# Altium PCB qav90.PcbDoc (part 3 of 3)
Units mm, origin at the board's own origin, x right, y up, seen from the top; angles counter-clockwise.
Board outline 90 x 90 mm, 3 copper layers (Top Layer, Mid-Layer 1, Bottom Layer); 94 components, 77 nets, 335 pads, 152 vias.
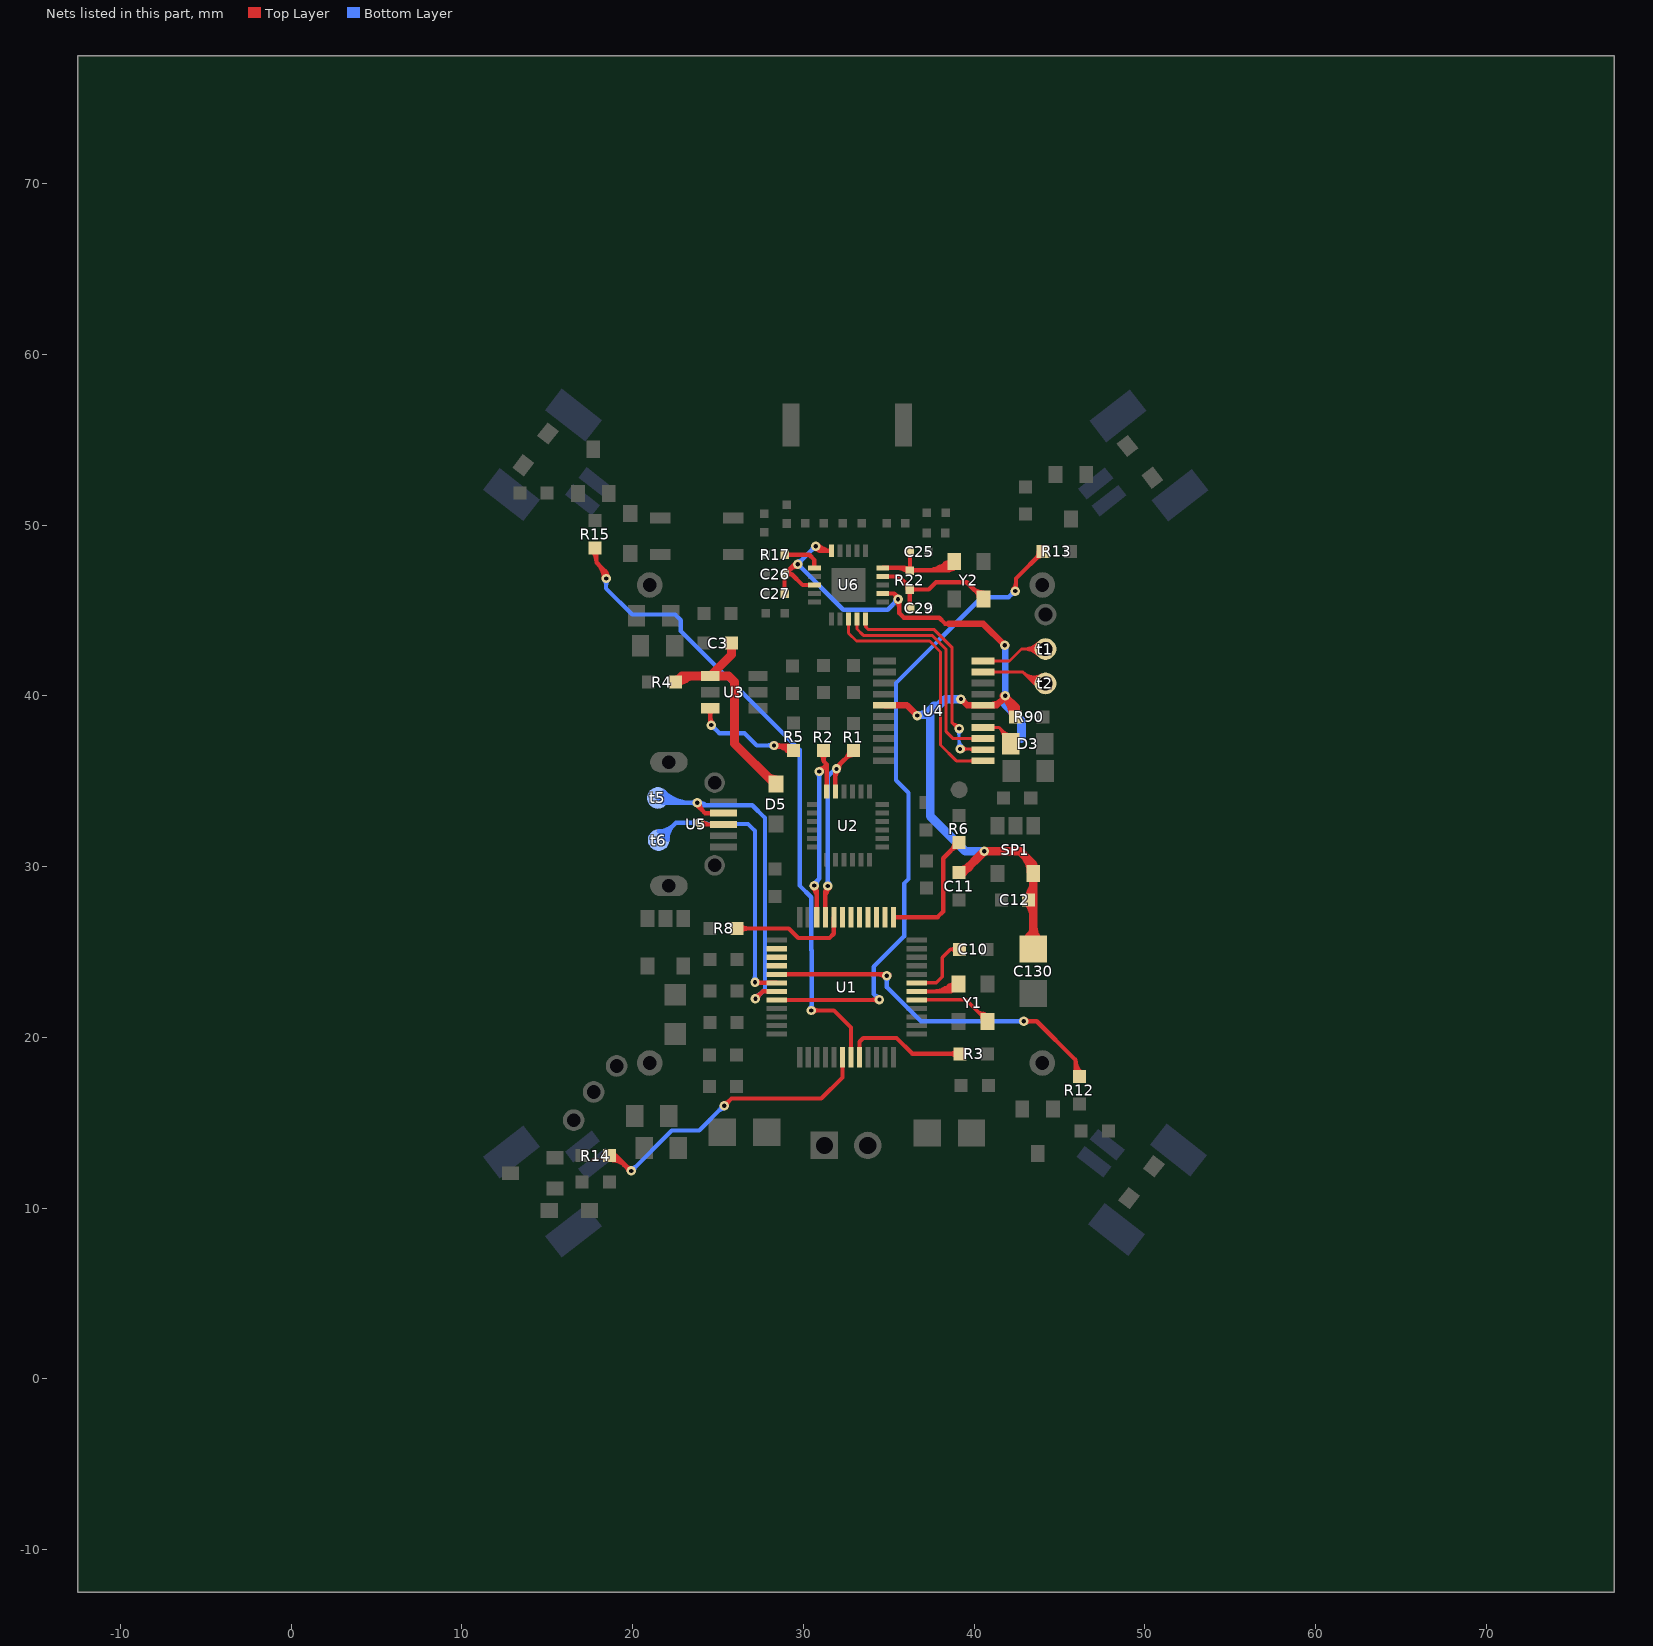
[diagram p3: the nets of this part, all layers, seen from the top]

## Via types
v1: diameter 0.55, hole 0.25, Top Layer to Bottom Layer, tented both sides, 152 vias

## Nets (pads, with @x,y where several pads share a name; then routed paths per layer and width w, separated by ;. In a path a pad name is that pad's centre, name@x,y a point inside that pad or via, vN(x,y) a via of type N, cw(c..) or ccw(c..) an arc to the next point about the centre after c; other vN are vias at no path point) (continued)
NetR3_1: R3.1 U1.44 | length 9.2
  Top Layer w0.254: U1.44@33.288,18.846 33.288,19.75 33.505,19.967 35.459,19.967 36.387,19.039 R3.1@39.181,19.039 ; 38.568,19.039 cw(c38.568,18.426) 39.002,18.86 ccw(c38.568,18.426) 38.568,19.039 ; 38.568,19.039 ccw(c38.568,19.652) 39.002,19.219 cw(c38.568,19.652) 38.568,19.039
NetR5_2: R5.2 U3.6 | length 18.2
  Top Layer w0.254: U3.6@24.548,39.273 24.548,38.346 v1(24.602,38.292) ; 28.782,36.973 ccw(c28.998,37.282) R5.2@29.255,37.005 ; 29.039,36.792 ccw(c29.217,37.046) R5.2@29.428,36.819 ; 24.548,38.855 cw(c24.966,38.855) 24.67,39.15 ccw(c24.966,38.855) 24.548,38.855 ; 24.548,38.855 ccw(c24.13,38.855) 24.426,39.15 cw(c24.13,38.855) 24.548,38.855 ; v1(28.285,37.099) cw(c28.285,35.861) 29.233,36.656 ccw(c28.285,35.861) v1(28.285,37.099) ; v1(28.285,37.099) 29.149,37.099 R5.2@29.428,36.819 ; v1@28.359,36.97 cw(c28.537,36.661) 28.63,37.006 ; v1@28.359,36.97 cw(c28.537,36.661) 28.63,37.006 ; v1@28.359,36.97 cw(c28.537,36.661) 28.63,37.006 ; v1@28.413,37.173 ccw(c28.722,37.351) 28.63,37.006 ; v1@28.413,37.173 ccw(c28.722,37.351) 28.63,37.006 ; v1@28.413,37.173 ccw(c28.722,37.351) 28.63,37.006 ; 28.642,37.099 cw(c28.642,37.456) 28.389,37.203 ccw(c28.642,37.456) 28.642,37.099 ; 28.642,37.099 ccw(c28.642,36.741) 28.389,36.994 cw(c28.642,36.741) 28.642,37.099 ; R5.2@29.428,36.819 ccw(c28.829,36.318) 28.829,37.099 cw(c28.829,36.318) R5.2@29.428,36.819 ; 24.548,38.78 ccw(c25.089,38.78) 24.706,38.397 cw(c25.089,38.78) 24.548,38.78
  Bottom Layer w0.254: v1(24.602,38.292) 25.084,37.81 26.558,37.81 27.269,37.099 v1@28.361,37.099 ; 24.854,38.04 cw(c25.107,38.292) 24.75,38.292 ccw(c25.107,38.292) 24.854,38.04 ; 24.854,38.04 ccw(c24.602,37.787) 24.602,38.144 cw(c24.602,37.787) 24.854,38.04 ; 27.928,37.099 cw(c27.928,36.741) 28.18,36.994 ccw(c27.928,36.741) 27.928,37.099 ; 27.928,37.099 ccw(c27.928,37.456) 28.18,37.203 cw(c27.928,37.456) 27.928,37.099
NetR6_2: R6.2 U1.13 | length 9.4
  Top Layer w0.254: U1.13@35.27,27.046 37.866,27.046 38.191,27.37 38.191,30.495 R6.2@39.105,31.409 ; 38.672,30.976 cw(c39.105,30.542) 39.105,31.155 ccw(c39.105,30.542) 38.672,30.976 ; 38.672,30.976 ccw(c38.238,31.409) 38.851,31.409 cw(c38.238,31.409) 38.672,30.976
NetR8_2: R8.2 U1.20 | length 8.9
  Top Layer w0.254: R8.2@26.126,26.38 29.148,26.38 29.707,25.821 31.536,25.821 31.788,26.073 U1.20@31.788,27.046 ; 26.739,26.38 cw(c26.739,26.993) 26.305,26.559 ccw(c26.739,26.993) 26.739,26.38 ; 26.739,26.38 ccw(c26.739,25.767) 26.305,26.2 cw(c26.739,25.767) 26.739,26.38
NetR17_1: R17.1 U6.16 | length 3.3
  Top Layer w0.254: R17.1@28.925,48.275 30.342,48.275 30.65,47.967 U6.16@30.65,47.5 ; 29.199,48.275 cw(c29.199,48.572) 28.989,48.362 ccw(c29.199,48.572) 29.199,48.275 ; 29.199,48.275 ccw(c29.199,47.978) 28.989,48.188 cw(c29.199,47.978) 29.199,48.275
NetU1_5: U1.5 Y1.1 | length 8.2
  Top Layer w0.203: U1.5@36.638,22.196 39.528,22.196 Y1.1@40.786,20.938 ; Y1.1@40.542,21.402 cw(c40.413,20.918) Y1.1@40.889,21.071 ; 40.106,21.618 ccw(c40.786,22.298) 40.786,21.336 cw(c40.786,22.298) 40.106,21.618 ; 40.348,21.376 cw(c40.009,21.038) 40.488,21.038 ccw(c40.009,21.038) 40.348,21.376 ; Y1.1@40.453,21.271 ccw(c40.786,21.604) 40.786,21.133 cw(c40.786,21.604) Y1.1@40.453,21.271
NetU1_6: U1.6 Y1.3 | length 11.1
  Top Layer w0.25: U1.6@36.638,22.696 38.644,22.696 ; 38.204,22.835 cw(c38.548,22.239) Y1.3@38.933,22.81 ; 38.53,22.745 cw(c38.797,22.282) Y1.3@38.988,22.781 ; 38.55,22.756 ccw(c38.259,23.259) Y1.3@38.821,23.109 ; 38.551,23.035 cw(c38.797,22.608) Y1.3@39.072,23.017 ; Y1.3@39.086,23.138 38.644,22.696 ; 38.644,22.696 cw(c38.886,22.454) 38.997,22.778 ccw(c38.886,22.454) 38.644,22.696 ; 37.597,22.696 ccw(c37.597,24.527) 38.892,23.232 cw(c37.597,24.527) 37.597,22.696 ; 38.2,22.696 ccw(c38.2,23.924) 39.069,23.055 cw(c38.2,23.924) 38.2,22.696 ; Y1.3@38.688,22.739 ccw(c38.389,23.038) 38.811,23.038 cw(c38.389,23.038) Y1.3@38.688,22.739
PWM1: R12.2 U1.29 | length 26.9
  Top Layer w0.254: U1.29@28.438,23.696 34.906,23.696 35.041,23.56 v1@35.041,23.687 ; v1(42.915,20.944) 43.677,20.944 45.938,18.684 ; R12.2@45.938,17.962 45.938,18.684 ; 45.938,18.175 ccw(c46.532,18.175) R12.2@46.175,17.7 ; R12.2@46.328,17.903 cw(c46.914,18.684) 45.938,18.684 ; 43.273,20.944 cw(c43.273,21.301) 43.02,21.049 ccw(c43.273,21.301) 43.273,20.944 ; 43.273,20.944 ccw(c43.273,20.587) 43.02,20.84 cw(c43.273,20.587) 43.273,20.944 ; 34.327,23.696 cw(c34.327,23.05) 34.784,23.507 ccw(c34.327,23.05) 34.327,23.696
  Bottom Layer w0.254: v1(34.889,23.611) 34.889,22.945 36.89,20.944 v1(42.915,20.944) ; v1@35.041,23.611 v1@35.041,23.687 ; 34.889,23.254 cw(c35.246,23.254) 34.993,23.507 ccw(c35.246,23.254) 34.889,23.254 ; 34.889,23.254 ccw(c34.532,23.254) 34.784,23.507 cw(c34.532,23.254) 34.889,23.254 ; 42.558,20.944 cw(c42.558,20.587) 42.811,20.84 ccw(c42.558,20.587) 42.558,20.944 ; 42.558,20.944 ccw(c42.558,21.301) 42.811,21.049 cw(c42.558,21.301) 42.558,20.944
PWM2: R13.2 U1.32 | length 42.7
  Top Layer w0.25: U1.32@28.438,22.196 34.439,22.196 v1(34.457,22.214) ; v1@42.301,46.247 ccw(c41.927,46.621) 42.456,46.621 ; v1(42.407,46.141) 42.456,46.19 42.456,46.881 R13.2@44.05,48.475 ; R13.2@43.794,48.475 cw(c43.176,48.475) 43.613,48.038 cw(c44.05,47.601) R13.2@44.05,48.219 ; 34.05,22.196 ccw(c34.05,22.621) 34.351,22.32 cw(c34.05,22.621) 34.05,22.196 ; 34.139,22.196 cw(c34.139,21.896) 34.351,22.108 ccw(c34.139,21.896) 34.139,22.196
  Bottom Layer w0.25: v1(34.457,22.214) 34.127,22.544 34.127,24.145 35.905,25.923 35.905,29.021 36.159,29.275 36.159,34.33 35.422,35.067 35.422,40.756 40.451,45.785 42.026,45.785 v1@42.28,46.039 ; 34.201,22.47 cw(c33.945,22.214) 34.307,22.214 ccw(c33.945,22.214) 34.201,22.47 ; 34.201,22.47 ccw(c34.457,22.726) 34.457,22.364 cw(c34.457,22.726) 34.201,22.47 ; 42.108,45.867 cw(c42.407,45.568) 42.407,45.991 ccw(c42.407,45.568) 42.108,45.867 ; 42.169,45.928 ccw(c41.956,46.141) 42.257,46.141 cw(c41.956,46.141) 42.169,45.928
PWM3: R14.2 U1.42 | length 22.5
  Top Layer w0.25: R14.2@18.65,12.819 cw(c18.65,11.273) v1@19.743,12.366 ; R14.2@18.65,13.069 cw(c18.65,12.126) 19.316,12.793 ; R14.2@18.65,13.075 19.034,13.075 ; R14.2@18.886,12.976 cw(c19.034,12.914) 19.034,13.075 ; R14.2@18.886,13.174 ccw(c19.034,13.236) 19.034,13.075 ; 19.507,12.503 cw(c19.21,11.989) v1@19.783,12.142 ; v1@19.778,12.181 ccw(c19.416,12.181) 19.672,12.437 ccw(c19.928,12.693) v1@19.928,12.331 ; v1(19.928,12.181) 19.034,13.075 ; v1(25.375,16) 25.798,16.423 31.053,16.423 32.288,17.658 U1.42@32.288,18.846 ; v1@25.375,16.15 ccw(c25.375,16.512) 25.631,16.256 ccw(c25.887,16) v1@25.525,16
  Bottom Layer w0.25: v1(19.928,12.181) 22.297,14.55 23.9,14.55 v1@25.362,16.013 ; v1@19.928,12.331 ccw(c19.928,12.693) 20.184,12.437 ccw(c20.44,12.181) v1@20.078,12.181 ; 25.076,15.726 cw(c25.375,15.428) v1@25.375,15.85 ; 25.137,15.787 ccw(c24.923,16) v1@25.225,16
PWM4: R15.2 U1.43 | length 44.7
  Top Layer w0.25: R15.2@17.619,48.494 cw(c16.975,47.85) 17.886,47.85 ; 17.886,48.264 cw(c18.211,48.264) R15.2@17.981,48.494 ; R15.2@17.886,48.89 17.886,47.823 18.445,47.264 ccw(c18.842,47.264) v1@18.561,46.984 ; 17.933,47.777 cw(c17.034,46.878) v1@18.305,46.878 ; v1@18.349,46.984 ccw(c18.118,47.215) 18.445,47.215 ; 18.359,47.35 cw(c17.887,46.878) v1@18.555,46.878 ; v1(30.469,21.579) 31.79,21.579 32.788,20.581 U1.43@32.788,18.846 ; 30.831,21.579 cw(c30.831,21.941) 30.575,21.685 ccw(c30.831,21.941) 30.831,21.579 ; 30.831,21.579 ccw(c30.831,21.217) 30.575,21.473 cw(c30.831,21.217) 30.831,21.579
  Bottom Layer w0.25: v1@18.445,46.979 18.445,46.304 19.979,44.769 22.494,44.769 22.824,44.439 22.824,43.804 29.783,36.845 29.783,28.894 30.469,28.209 30.469,25.11 30.495,25.084 30.495,21.579 v1(30.469,21.579) ; v1@18.349,46.772 cw(c18.118,46.54) 18.445,46.54 ccw(c18.118,46.54) v1@18.349,46.772 ; 18.445,46.491 cw(c18.842,46.491) 18.561,46.772 ccw(c18.842,46.491) 18.445,46.491 ; v1@30.363,21.685 ccw(c30.046,22.003) 30.495,22.003 cw(c30.046,22.003) v1@30.363,21.685 ; 30.495,21.88 ccw(c30.77,21.88) 30.575,21.685 cw(c30.77,21.88) 30.495,21.88
  other v1: 18.455,46.878
R_CE: U1.19
R_CS: U1.18
R_I: U1.17
R_INT: U1.14
R_K: U1.15
R_O: U1.16
RFVCC: C11.2 C12.1 C26.2 C27.2 C130.1 R90.1 SP1.5 U4.5 U4.16 U6.7 U6.15 U6.18 | length 91.5
  Top Layer w0.254: C27.2@28.902,46.039 C26.2@28.902,47.111 ; C26.2@28.902,47.132 29.491,47.721 v1(29.668,47.721) ; C26.2@28.925,47.133 29.324,47.133 29.958,46.5 U6.18@30.65,46.5 ; C26.2@29.021,47.1 cw(c29.562,46.955) 29.282,47.44 ; v1(30.723,48.775) 30.998,48.5 U6.15@31.65,48.5 ; v1@30.779,48.638 cw(c30.971,48.178) 31.25,48.591 ; v1@30.862,48.725 ccw(c31.036,48.663) 30.933,48.51 ; U6.7@34.65,46 35.335,46 ; v1@35.613,45.722 35.335,46 ; v1@35.625,45.658 35.625,44.846 35.892,44.579 37.96,44.579 38.303,44.236 38.521,44.236 ; 28.902,46.286 cw(c28.605,46.286) 28.815,46.076 ccw(c28.605,46.286) 28.902,46.286 ; 28.902,46.286 ccw(c29.199,46.286) 28.989,46.076 cw(c29.199,46.286) 28.902,46.286 ; 28.902,46.835 cw(c29.199,46.835) C26.2@28.989,47.045 ; 28.902,46.835 ccw(c28.605,46.835) 28.815,47.045 cw(c28.605,46.835) 28.902,46.835 ; 28.902,46.835 cw(c29.199,46.835) C26.2@28.989,47.045 ; C26.2@28.989,47.045 cw(c29.203,46.831) 29.203,47.133 ccw(c29.203,46.831) C26.2@28.989,47.045 ; C26.2@29.112,47.342 cw(c28.902,47.552) 28.902,47.255 ccw(c28.902,47.552) C26.2@29.112,47.342 ; C26.2@29.112,47.342 ccw(c29.322,47.132) 29.025,47.132 cw(c29.322,47.132) C26.2@29.112,47.342 ; 30.975,48.522 cw(c31.228,48.775) 30.871,48.775 ccw(c31.228,48.775) 30.975,48.522 ; 30.975,48.522 ccw(c30.723,48.27) 30.723,48.627 cw(c30.723,48.27) 30.975,48.522 ; U6.15@31.65,48.5 cw(c31.65,49.58) 30.834,48.872 ccw(c31.65,49.58) U6.15@31.65,48.5 ; 35.335,46 cw(c35.125,45.791) 35.408,45.702 ccw(c35.125,45.791) 35.335,46 ; C26.2@28.989,47.219 ccw(c29.196,47.425) 29.196,47.133 cw(c29.196,47.425) C26.2@28.989,47.219 ; C26.2@29.113,47.343 cw(c29.668,46.787) 29.668,47.573 ccw(c29.668,46.787) C26.2@29.113,47.343 ; v1@30.643,48.705 ccw(c31.093,49.097) 31.093,48.5 cw(c31.093,49.097) v1@30.643,48.705 ; v1@35.445,45.554 cw(c35.008,45.117) 35.625,45.117 ccw(c35.008,45.117) v1@35.445,45.554
  Top Layer w0.381: U4.5@34.762,39.452 36.066,39.452 v1(36.667,38.851) ; 38.521,44.236 40.528,44.236 v1(41.798,42.966) v1@41.899,42.966 ; v1(39.232,39.816) 39.597,39.452 U4.16@40.512,39.452 41.331,39.452 41.823,39.943 v1(41.823,40.02) ; U4.16@40.987,39.461 ccw(c40.987,40.315) 41.591,39.711 cw(c40.987,40.315) U4.16@40.987,39.461 ; 41.625,39.745 ccw(c41.351,40.02) 41.739,40.02 cw(c41.351,40.02) 41.625,39.745
  Top Layer w0.508: C11.2@39.131,29.656 39.359,29.656 v1(40.604,30.901) 42.687,30.901 43.474,30.114 43.474,26.149 ; C11.2@39.241,29.593 cw(c39.869,29.23) 39.681,29.931 ; v1@41.739,40.02 41.781,39.977 v1@41.819,39.939 ; R90.1@42.298,38.776 ccw(c40.662,38.783) v1@41.819,39.939 ; R90.1@42.425,38.775 42.425,39.333 v1@41.819,39.939 ; 42.932,30.656 cw(c41.976,29.7) SP1.5@43.328,29.7 ; C130.1@43.089,25.561 ccw(c42.159,26.491) 43.474,26.491 ; 43.103,30.485 cw(c42.318,29.7) SP1.5@43.428,29.7 ; C12.1@43.105,27.966 cw(c42.213,27.075) 43.474,27.075 ; C130.1@43.189,25.64 ccw(c42.877,26.149) 43.474,26.149 ; C130.1@43.2,25.875 43.474,26.149 ; 43.312,30.132 ccw(c43.799,30.263) SP1.5@43.547,29.826 ; C12.1@43.317,28.089 cw(c44.018,28.277) 43.39,28.64 ; 43.474,26.496 ccw(c44.796,26.496) C130.1@43.861,25.561 ; C130.1@43.759,25.641 cw(c44.069,26.149) 43.474,26.149 ; C11.2@39.131,29.783 ccw(c39.131,30.641) 39.737,30.034 cw(c39.131,30.641) C11.2@39.131,29.783 ; C12.1@43.105,28.146 ccw(c42.213,29.037) 43.474,29.037 cw(c42.213,29.037) C12.1@43.105,28.146
  Bottom Layer w0.254: v1(30.723,48.775) v1(29.668,47.721) 32.34,45.049 34.94,45.049 v1(35.549,45.658) ; v1@29.816,47.721 ccw(c30.173,47.721) 29.921,47.468 ; v1@29.816,47.721 cw(c30.173,47.721) 29.921,47.973 ; v1@29.816,47.721 ccw(c30.173,47.721) 29.921,47.468 ; v1@29.816,47.721 cw(c30.173,47.721) 29.921,47.973 ; 29.921,47.468 ccw(c29.668,47.215) 29.668,47.573 cw(c29.668,47.215) 29.921,47.468 ; 29.921,47.973 cw(c29.668,48.226) 29.668,47.869 ccw(c29.668,48.226) 29.921,47.973 ; 30.47,48.522 cw(c30.723,48.27) 30.723,48.627 ccw(c30.723,48.27) 30.47,48.522 ; 30.47,48.522 ccw(c30.217,48.775) 30.575,48.775 cw(c30.217,48.775) 30.47,48.522 ; 35.297,45.406 cw(c35.549,45.153) 35.549,45.51 ccw(c35.549,45.153) 35.297,45.406 ; 35.297,45.406 ccw(c35.044,45.658) 35.401,45.658 cw(c35.044,45.658) 35.297,45.406
  Bottom Layer w0.381: v1(36.667,38.851) 37.099,38.851 37.429,39.181 ; v1@36.733,38.799 cw(c37.11,38.498) 37.056,38.977 ; v1(41.823,40.02) 41.823,42.89 v1@41.899,42.966 ; 37.429,39.181 cw(c36.81,39.8) 36.679,38.935 ccw(c36.81,39.8) 37.429,39.181
  Bottom Layer w0.508: 37.429,38.978 37.429,32.958 39.486,30.901 v1(40.604,30.901) ; 37.429,39.181 37.657,39.41 37.911,39.41 38.318,39.816 v1(39.232,39.816) ; v1(41.823,40.02) 41.823,39.502 42.775,38.55 42.775,37.525 42.752,37.502 ; v1@41.844,40.02 ccw(c43.144,40.02) 42.225,39.1
RST: C10.1 U1.7 | length 5.4
  Top Layer w0.203: U1.7@36.638,23.196 37.775,23.196 38.14,23.56 38.14,24.678 38.623,25.161 ; C10.1@39.156,25.161 38.623,25.161 ; 38.623,25.161 cw(c38.623,24.791) 38.926,25.001 ccw(c38.623,24.791) 38.623,25.161 ; 38.623,25.161 ccw(c38.623,25.53) 38.926,25.32 cw(c38.623,25.53) 38.623,25.161
RX: t5.1 U1.31 U5.2 | length 34.3
  Top Layer w0.254: v1(23.789,33.746) 23.789,33.586 24.238,33.137 U5.2@25.325,33.137 ; v1@23.937,33.746 ccw(c24.68,33.746) 24.155,33.22 ; v1(27.193,22.265) 27.623,22.696 U1.31@28.438,22.696 ; 27.445,22.518 cw(c27.193,22.77) 27.193,22.413 ccw(c27.193,22.77) 27.445,22.518 ; 27.445,22.518 ccw(c27.698,22.265) 27.341,22.265 cw(c27.698,22.265) 27.445,22.518
  Bottom Layer w0.254: t5.1@21.968,34.157 ccw(c22.344,34.257) 22.149,33.921 ; v1@23.886,33.634 cw(c24.072,33.417) 24.216,33.665 ; v1(27.193,22.265) 27.751,22.824 27.751,32.857 27.015,33.593 23.941,33.593 v1(23.789,33.746) 21.757,33.746 t5.1@21.478,34.025 ; t5.1@21.478,34.025 ccw(c22.152,34.7) 22.152,33.746 cw(c22.152,34.7) t5.1@21.478,34.025 ; 23.432,33.746 cw(c23.432,33.388) 23.684,33.641 ccw(c23.432,33.388) 23.432,33.746 ; 23.432,33.746 ccw(c23.432,34.103) 23.684,33.85 cw(c23.432,34.103) 23.432,33.746 ; 27.445,22.518 cw(c27.193,22.77) 27.193,22.413 ccw(c27.193,22.77) 27.445,22.518 ; 27.445,22.518 ccw(c27.698,22.265) 27.341,22.265 cw(c27.698,22.265) 27.445,22.518 ; t5.1@21.657,34.205 ccw(c22.765,35.313) 22.765,33.746 cw(c22.765,35.313) t5.1@21.657,34.205 ; t5.1@21.837,34.384 ccw(c23.379,35.926) 23.379,33.746 cw(c23.379,35.926) t5.1@21.837,34.384 ; v1@23.894,33.85 ccw(c24.514,34.471) 24.514,33.593 cw(c24.514,34.471) v1@23.894,33.85
SCL: R1.1 U1.21 U2.23 | length 20.3
  Top Layer w0.254: U1.21@31.288,27.046 31.288,28.545 ; v1@31.325,28.77 cw(c31.124,28.588) 31.359,28.452 ; v1@31.434,28.691 31.288,28.545 ; U2.23@31.875,34.4 v1@31.875,35.727 ; v1@31.904,35.765 R1.1@32.933,36.794 ; 31.288,28.545 ccw(c31.154,28.68) 31.312,28.786 cw(c31.154,28.68) 31.288,28.545 ; 32.499,36.36 cw(c32.933,35.927) 32.933,36.54 ccw(c32.933,35.927) 32.499,36.36 ; 32.499,36.36 ccw(c32.066,36.794) 32.679,36.794 cw(c32.066,36.794) 32.499,36.36 ; 31.288,28.159 cw(c32.144,28.159) 31.539,28.764 ccw(c32.144,28.159) 31.288,28.159 ; 31.288,28.514 cw(c31.502,28.514) 31.462,28.724 ccw(c31.502,28.514) 31.288,28.514 ; 31.875,35.207 cw(c32.462,35.207) 32.047,35.622 ccw(c32.462,35.207) 31.875,35.207 ; v1@32.09,35.727 cw(c32.632,35.727) 32.249,36.11 ccw(c32.632,35.727) v1@32.09,35.727
  Bottom Layer w0.254: v1@31.434,28.691 31.434,35.295 31.866,35.727 v1(31.942,35.727) ; 31.434,29.226 cw(c31.077,29.226) 31.33,28.974 ccw(c31.077,29.226) 31.434,29.226 ; 31.434,29.226 ccw(c31.792,29.226) 31.539,28.974 cw(c31.792,29.226) 31.434,29.226 ; 31.56,35.42 cw(c31.942,35.038) 31.942,35.579 ccw(c31.942,35.038) 31.56,35.42
  other v1: 31.434,28.869
SCLK: U1.26
SDA: R2.1 U1.22 U2.24 | length 19.7
  Top Layer w0.254: v1@30.495,28.869 30.788,28.575 ; 30.719,28.485 cw(c30.944,28.614) v1@30.755,28.793 ; U1.22@30.788,27.046 30.788,28.575 ; v1(30.926,35.575) 30.96,35.575 31.375,35.99 ; R2.1@31.18,36.794 31.18,36.184 ; U2.24@31.375,34.4 31.375,35.99 ; 30.788,28.575 cw(c30.918,28.704) 30.768,28.809 ccw(c30.918,28.704) 30.788,28.575 ; 31.18,36.184 cw(c31.785,36.184) 31.359,36.613 ccw(c31.785,36.184) 31.18,36.184 ; 31.18,36.184 ccw(c30.576,36.184) 31.002,36.613 cw(c30.576,36.184) 31.18,36.184 ; 31.18,36.184 31.375,35.99 ; v1@30.542,28.79 cw(c29.948,28.196) 30.788,28.196 ccw(c29.948,28.196) v1@30.542,28.79 ; v1@30.62,28.749 cw(c30.581,28.545) 30.788,28.545 ccw(c30.581,28.545) v1@30.62,28.749 ; v1@30.926,35.723 ccw(c30.926,36.161) 31.236,35.851 cw(c30.926,36.161) v1@30.926,35.723 ; v1@31.074,35.575 cw(c31.351,35.575) 31.155,35.77 ccw(c31.351,35.575) v1@31.074,35.575
  Bottom Layer w0.254: v1@30.495,28.869 30.926,29.301 ; v1(30.926,35.575) 30.926,29.301 ; 30.926,29.301 ccw(c31.255,28.972) 30.794,28.913 cw(c31.255,28.972) 30.926,29.301 ; 30.926,35.217 cw(c31.284,35.217) 31.031,35.47 ccw(c31.284,35.217) 30.926,35.217 ; 30.926,35.217 ccw(c30.569,35.217) 30.822,35.47 cw(c30.569,35.217) 30.926,35.217
  other v1: 30.647,28.894
SDI: U1.28
SDO: U1.27
SPI_MISO: U4.12 U6.5 | length 20.2
  Top Layer w0.178: U6.5@33.65,44.5 33.65,44.052 33.822,43.88 37.671,43.88 38.699,42.853 38.699,38.445 ; 38.819,38.348 cw(c38.719,37.925) v1@39.123,38.086 ; v1(39.131,38.089) 39.054,38.089 38.699,38.445 ; v1(39.181,36.895) 40.468,36.895 U4.12@40.512,36.852 ; 38.699,38.445 ccw(c39.109,38.855) 39.125,38.275 cw(c39.109,38.855) 38.699,38.445 ; 39.631,36.895 cw(c39.631,37.345) 39.313,37.027 ccw(c39.631,37.345) 39.631,36.895 ; 39.631,36.895 ccw(c39.631,36.446) 39.313,36.764 cw(c39.631,36.446) 39.631,36.895 ; 38.867,38.277 cw(c38.679,38.089) 38.945,38.089 ccw(c38.679,38.089) 38.867,38.277 ; 39.663,36.895 cw(c39.663,36.478) 39.958,36.773 ccw(c39.663,36.478) 39.663,36.895
  Bottom Layer w0.178: v1@39.105,38.115 39.105,36.972 v1(39.181,36.895) ; v1@38.999,37.958 cw(c38.743,37.701) 39.105,37.701 ccw(c38.743,37.701) v1@38.999,37.958 ; v1@39.05,37.027 ccw(c38.916,37.161) 39.105,37.161 cw(c38.916,37.161) v1@39.05,37.027 ; 39.105,37.529 ccw(c39.815,37.529) 39.313,37.027 cw(c39.815,37.529) 39.105,37.529 ; 39.105,37.579 cw(c39.641,37.579) 39.262,37.958 ccw(c39.641,37.579) 39.105,37.579
SPI_MOSI: U4.13 U6.4 | length 14.3
  Top Layer w0.178: U6.4@33.15,44.5 33.15,43.917 33.517,43.55 37.534,43.55 38.369,42.716 38.369,37.911 38.778,37.502 U4.13@40.512,37.502 ; 39.769,37.502 cw(c39.769,37.233) 39.958,37.423 ccw(c39.769,37.233) 39.769,37.502 ; 39.769,37.502 ccw(c39.769,37.77) 39.958,37.58 cw(c39.769,37.77) 39.769,37.502
SPI_SCK: U4.11 U6.3 | length 15.8
  Top Layer w0.178: U6.3@32.65,44.5 32.65,43.681 33.111,43.22 37.398,43.22 38.038,42.579 38.038,37.124 38.961,36.202 U4.11@40.512,36.202 ; 39.769,36.202 cw(c39.769,35.933) 39.958,36.123 ccw(c39.769,35.933) 39.769,36.202 ; 39.769,36.202 ccw(c39.769,36.47) 39.958,36.28 cw(c39.769,36.47) 39.769,36.202
STM8-LED: D3.2 U4.14 | length 4.6
  Top Layer w0.178: U4.14@40.512,38.152 41.473,38.152 ; U4.14@41.065,38.073 cw(c41.255,37.883) 41.255,38.152 cw(c41.255,38.42) U4.14@41.065,38.23 ; 41.687,37.938 ccw(c42.15,38.401) D3.2@42.15,37.746 ; 41.728,37.897 cw(c41.274,37.443) D3.2@41.911,37.359 ; D3.2@41.735,37.382 ccw(c40.824,37.502) 41.473,38.152 ; D3.2@42.15,37.2 42.15,37.475 41.473,38.152
SWCK: t1.1 U4.20 | length 10.7
  Top Layer w0.178: U4.20@40.512,42.052 42.077,42.052 42.776,42.75 t1.1@44.185,42.75 ; t1.1@43.799,42.364 ccw(c42.867,41.432) 42.867,42.75 ccw(c42.867,44.068) t1.1@43.799,43.136 ; t1.1@43.895,42.459 ccw(c43.193,41.758) 43.193,42.75 ccw(c43.193,43.743) t1.1@43.895,43.041 ; t1.1@43.925,42.49 ccw(c43.296,41.861) 43.296,42.75 ccw(c43.296,43.639) t1.1@43.925,43.011 ; t1.1@44.02,42.585 ccw(c43.622,42.187) 43.622,42.75 ccw(c43.622,43.313) t1.1@44.02,42.915 ; 41.255,42.052 cw(c41.255,42.32) 41.065,42.13 ccw(c41.255,42.32) 41.255,42.052 ; 41.255,42.052 ccw(c41.255,41.783) 41.065,41.973 cw(c41.255,41.783) 41.255,42.052
SWIO: t2.1 U4.19 | length 10
  Top Layer w0.178: U4.19@40.512,41.402 42.854,41.402 ; 43.03,41.226 ccw(c43.641,41.837) t2.1@44.023,41.061 ; 43.205,41.05 ccw(c43.757,41.602) t2.1@44.101,40.902 ; 43.381,40.875 ccw(c43.873,41.366) t2.1@44.18,40.742 ; t2.1@43.649,40.628 ccw(c43.525,40.605) 43.525,40.731 ; t2.1@43.649,40.833 cw(c43.525,40.857) 43.525,40.731 ; t2.1@43.816,40.549 ccw(c43.525,40.406) 43.525,40.731 ; t2.1@43.816,40.912 cw(c43.525,41.056) 43.525,40.731 ; t2.1@43.944,41.221 cw(c43.525,42.073) 42.854,41.402 ; t2.1@44.185,40.731 43.525,40.731 ; 41.255,41.402 cw(c41.255,41.67) 41.065,41.48 ccw(c41.255,41.67) 41.255,41.402 ; 41.255,41.402 ccw(c41.255,41.133) 41.065,41.323 cw(c41.255,41.133) 41.255,41.402 ; 42.854,41.402 43.525,40.731
TX: t6.1 U1.30 U5.3 | length 27.5
  Top Layer w0.254: v1(23.916,32.577) 24.018,32.475 U5.3@25.325,32.475 ; v1@24.021,32.682 ccw(c24.521,33.182) 24.521,32.475 ; v1(27.167,23.23) 27.202,23.196 U1.30@28.438,23.196 ; v1@27.272,23.126 cw(c27.441,22.956) 27.441,23.196 ccw(c27.441,22.956) v1@27.272,23.126 ; v1@27.272,23.335 ccw(c27.608,23.671) 27.608,23.196 cw(c27.608,23.671) v1@27.272,23.335
  Bottom Layer w0.254: 22.168,32.241 ccw(c22.398,31.383) t6.1@21.528,31.561 ; 22.208,32.201 cw(c21.35,32.431) t6.1@21.528,31.561 ; v1@23.811,32.473 ccw(c23.559,32.22) 23.559,32.577 ccw(c23.559,32.935) v1@23.811,32.682 ; v1@24.021,32.682 ccw(c24.46,33.122) 24.46,32.5 ; v1(27.167,23.23) 27.167,32.095 26.762,32.5 23.993,32.5 v1(23.916,32.577) 22.544,32.577 t6.1@21.528,31.561 ; 22.396,32.429 cw(c21.528,33.296) 21.528,32.069 ccw(c21.528,33.296) 22.396,32.429 ; 22.396,32.429 ccw(c23.263,31.561) 22.036,31.561 cw(c23.263,31.561) 22.396,32.429 ; 27.167,23.587 cw(c26.81,23.587) 27.063,23.335 ccw(c26.81,23.587) 27.167,23.587 ; 27.167,23.587 ccw(c27.525,23.587) 27.272,23.335 cw(c27.525,23.587) 27.167,23.587
VBUS: C3.2 D5.2 R4.2 U3.4 | length 18.5
  Top Layer w0.508: R4.2@22.519,40.807 22.885,41.173 U3.4@24.548,41.173 ; R4.2@22.552,40.93 ccw(c22.739,41.63) 23.102,41.002 ; C3.2@25.795,43.093 25.795,42.42 U3.4@24.548,41.173 ; 27.845,35.33 ccw(c28.411,35.897) D5.2@28.411,35.096 ; 27.862,35.313 ccw(c28.386,35.837) D5.2@28.386,35.096 ; D5.2@28.386,34.85 28.325,34.85 25.973,37.202 25.973,40.832 25.633,41.173 U3.4@24.548,41.173 ; R4.2@22.609,40.717 cw(c23.708,39.617) 23.708,41.173 ccw(c23.708,39.617) R4.2@22.609,40.717 ; U3.4@24.844,41.173 cw(c25.559,41.173) 25.053,41.678 ccw(c25.559,41.173) U3.4@24.844,41.173
XC1: C25.2 R22.1 U6.10 Y2.3 | length 21.9
  Top Layer w0.254: U6.10@34.65,47.5 35.943,47.5 ; 35.821,47.436 ccw(c35.993,47.734) R22.1@36.171,47.44 ; C25.2@36.25,48.275 R22.1@36.25,47.193 ; 37.889,47.518 cw(c38.324,46.784) Y2.3@38.723,47.539 ; 38.232,47.445 cw(c38.593,46.82) Y2.3@38.779,47.517 ; 38.28,47.75 cw(c38.573,47.255) Y2.3@38.841,47.764 ; 38.308,47.489 ccw(c38.01,48.006) Y2.3@38.586,47.851 ; Y2.3@38.85,47.881 38.33,47.36 ; 35.943,47.5 cw(c35.943,47.331) 36.112,47.333 ccw(c35.943,47.331) 35.943,47.5 ; 35.943,47.5 ccw(c36.105,47.662) 36.19,47.449 cw(c36.105,47.662) 35.943,47.5 ; 35.943,47.5 R22.1@36.25,47.193 ; R22.1@36.25,47.193 36.25,47.36 38.33,47.36 ; 38.33,47.36 cw(c38.713,46.977) 38.804,47.511 ccw(c38.713,46.977) 38.33,47.36 ; 35.539,47.5 cw(c35.539,46.639) 36.148,47.248 ccw(c35.539,46.639) 35.539,47.5 ; C25.2@36.14,48.365 cw(c35.875,48.1) 36.25,48.1 ccw(c35.875,48.1) C25.2@36.14,48.365 ; R22.1@36.148,47.422 ccw(c35.902,47.668) 36.25,47.668 cw(c35.902,47.668) R22.1@36.148,47.422 ; 36.25,47.596 ccw(c36.496,47.596) 36.322,47.422 cw(c36.496,47.596) 36.25,47.596 ; R22.1@36.322,47.248 cw(c36.593,46.977) 36.593,47.36 ccw(c36.593,46.977) R22.1@36.322,47.248 ; 37.176,47.36 ccw(c37.176,49.455) 38.657,47.974 cw(c37.176,49.455) 37.176,47.36 ; 37.789,47.36 ccw(c37.789,48.841) 38.837,47.794 cw(c37.789,48.841) 37.789,47.36 ; 38.402,47.36 ccw(c38.402,48.228) 39.016,47.614 cw(c38.402,48.228) 38.402,47.36 ; Y2.3@38.455,47.485 ccw(c38.159,47.781) 38.577,47.781 cw(c38.159,47.781) Y2.3@38.455,47.485
XC2: C29.2 R22.2 U6.9 Y2.1 | length 14.6
  Top Layer w0.254: U6.9@34.65,47 35.605,47 R22.2@36.37,46.235 ; R22.2@36.235,46.09 36.235,45.168 C29.2@36.253,45.15 ; R22.2@36.235,46.235 R22.2@36.37,46.235 ; 40.113,46.171 cw(c39.956,45.585) Y2.1@40.532,45.775 ; Y2.1@40.372,45.503 Y2.1@40.55,45.325 ; Y2.1@40.55,45.681 39.569,46.662 37.772,46.662 37.345,46.235 R22.2@36.37,46.235 ; 36.235,45.938 cw(c36.532,45.938) R22.2@36.322,46.148 ; 36.235,45.938 ccw(c35.938,45.938) 36.148,46.148 cw(c35.938,45.938) 36.235,45.938 ; 36.235,45.938 cw(c36.532,45.938) R22.2@36.322,46.148 ; R22.2@36.322,46.148 cw(c36.532,45.938) 36.532,46.235 ; R22.2@36.322,46.148 cw(c36.532,45.938) 36.532,46.235 ; 36.532,46.235 cw(c36.532,46.532) 36.322,46.322 ccw(c36.532,46.532) 36.532,46.235 ; 35.93,46.675 cw(c35.49,46.235) 36.112,46.235 ccw(c35.49,46.235) 35.93,46.675 ; C29.2@36.166,45.237 ccw(c35.998,45.405) 36.235,45.405 cw(c35.998,45.405) C29.2@36.166,45.237 ; 36.235,45.49 ccw(c36.592,45.49) 36.34,45.237 cw(c36.592,45.49) 36.235,45.49 ; 39.913,46.317 ccw(c40.55,46.954) 40.55,46.054 cw(c40.55,46.954) 39.913,46.317 ; Y2.1@40.155,46.076 cw(c39.859,45.781) 40.277,45.781 ccw(c39.859,45.781) Y2.1@40.155,46.076
pads on no net: B1.0 B2.0 E1.2 SP1.4 SP2.4 U1.10 U1.11 U1.12 U1.33 U1.38 U1.41 U1.45 U1.46 U2.2 U2.3 U2.4 U2.5 U2.6 U2.7 U2.14 U2.15 U2.16 U2.17 U2.19 U2.21 U2.22 U4.8 U5.0@24.805,30.075 U5.0@24.805,34.925 U5.4 Y1.2 Y1.4 Y2.2 Y2.4

## Polygon pours and split planes (outlines as drawn)
GND on Top Layer "Keep-Out Layer-No Net" (solid, remove dead copper, pour order 5): 2.05,67.3 8,61.35 67.675,61.35 67.675,12.6 61.65,6.575 56.1,1.025 9.025,1.025
GND on Bottom Layer "Keep-Out Layer-No Net" (solid, remove dead copper, pour order 7): 4.825,64.125 59.35,64.125 59.825,63.65 61.1,62.375 61.1,16.1 61.1,6.575 53.4,-1.125 52.05,0.225 7.6,0.225

## Keep-outs
Keep-Out Layer:
  lines w0.25: 3.706,3.474 4.907,4.331 ; 3.708,61.528 4.909,60.671 ; 4.49,2.375 5.691,3.232 ; 4.492,62.627 5.692,61.77 ; 5.717,57.273 10.814,53.291 ; 5.93,7.893 10.745,11.655 ; 8.809,2.528 14.374,6.876 ; 9.366,62.037 14.345,58.146 ; 50.605,6.893 55.86,2.787 ; 50.626,58.124 56.072,62.379 ; 54.229,11.676 59.259,7.746 ; 54.25,53.341 59.109,57.137 ; 59.308,3.23 60.508,2.373 ; 59.309,61.768 60.51,62.625 ; 60.091,4.329 61.292,3.472 ; 60.093,60.669 61.294,61.526
  lines w0.254: 1.012,6.926 ccw(c0,0) 6.904,-1.155 ; 1.019,6.933 ccw(c2.043,14.651) 6.072,7.989 ; 1.094,58.079 cw(c2.118,50.361) 5.74,57.253 ; 1.155,58.096 cw(c0,65) 6.879,66.298 ; 3.648,3.42 ccw(c0,0) 4.421,2.336 ; 3.648,61.58 cw(c0,65) 4.421,62.664 ; 4.907,4.331 cw(c4.749,3.389) 5.691,3.232 ; 4.909,60.671 ccw(c4.751,61.613) 5.692,61.77 ; 6.887,66.294 ccw(c14.518,67.839) 9.35,62.016 ; 6.9,-1.218 cw(c14.531,-2.763) 8.814,2.523 ; 10.75,11.659 cw(c14.633,11.242) 15.02,15.128 ; 10.777,53.263 ccw(c14.724,53.908) 14.982,49.917 ; 14.293,58.129 cw(c15.029,54.293) 18.915,54.684 ; 14.375,6.875 ccw(c14.913,10.837) 18.875,10.3 ; 14.981,49.928 cw(c3.625,38.125) 19.517,42.092 ; 14.986,26.678 cw(c16.074,25.64) 17.111,26.728 20,26.728 20,38.75 17,38.75 cw(c15.963,39.837) 14.875,38.8 14.875,44.825 15.85,44.825 16.775,43.9 16.775,42.075 19.525,42.075 ; 14.986,26.7 14.986,20.653 15.961,20.653 16.886,21.578 16.886,23.403 19.636,23.403 ; 15.017,15.132 ccw(c3.748,26.847) 19.634,23.403 ; 18.845,10.288 cw(c26.755,-2.71) 26.922,12.504 ; 18.914,54.683 ccw(c27.311,69.689) 26.25,52.527 ; 26.25,52.525 ccw(c26.263,54.512) 28.25,54.5 28.25,56.9 cw(c28.863,56.887) 28.875,57.5 ; 26.755,12.5 35.5,12.5 38.267,12.5 ; 28.85,57.5 36.125,57.5 ; 36.15,57.5 cw(c36.138,56.887) 36.75,56.875 36.75,54.475 ; 36.75,54.5 ccw(c38.737,54.512) 38.75,52.525 ; 38.1,12.504 cw(c38.267,-2.633) 46.137,10.299 ; 38.738,52.526 ccw(c37.689,69.689) 46.123,54.704 ; 45.364,23.403 48.114,23.403 48.114,21.578 49.039,20.653 50.014,20.653 50.014,29.003 ccw(c48.926,27.965) 47.889,29.053 47.889,26.728 45,26.728 45,38.75 48,38.75 48,36.425 ccw(c49.037,37.512) 50.125,36.475 50.125,44.825 49.15,44.825 48.225,43.9 48.225,42.075 45.479,42.075 ; 45.368,23.404 ccw(c61.375,26.875) 49.983,15.106 ; 45.479,42.074 cw(c61.375,38.125) 49.97,49.882 ; 46.093,10.243 ccw(c49.971,10.707) 50.707,6.871 ; 46.125,54.7 cw(c50.087,54.163) 50.625,58.125 ; 49.98,49.872 ccw(c50.367,53.758) 54.25,53.341 ; 49.985,15.08 cw(c50.276,11.092) 54.223,11.737 ; 55.758,2.887 cw(c50.482,-2.839) 58.113,-1.294 ; 56.083,62.368 ccw(c50.469,67.763) 58.1,66.218 ; 58.096,66.155 cw(c65,65) 63.988,58.074 ; 58.121,-1.298 ccw(c65,0) 63.845,6.904 ; 59.135,57.131 cw(c62.957,50.349) 63.981,58.067 ; 59.26,7.747 ccw(c62.882,14.639) 63.906,6.921 ; 59.308,3.23 cw(c60.249,3.387) 60.091,4.329 ; 59.309,61.768 ccw(c60.251,61.611) 60.093,60.669 ; 60.579,2.336 ccw(c65,0) 61.352,3.42 ; 60.579,62.664 cw(c65,65) 61.352,61.58

## Other copper
Top Layer:
  region net NetB1_1: 43.325,13.7 43.575,13.95 45.5,13.95 46.1,13.35 46,13.25 46,11.625 44.8,11.625 44.025,12.4 43.375,12.4 43.375,12.625 43.325,12.675
  region net 4V3: 50.625,13.025 49.425,14.225 48.8,14.225 48.15,13.575 48.15,13 48.275,13 49.875,12.275 50.816,11.81 51.075,12.375 51.05,12.575
  region net 4V3: 13.6,52.9 13.75,52.9 14.325,52.325 14.575,52.575 14.8,52.575 15.225,53 15.125,53.1 15.125,53.4 14.942,53.4 14.164,54.178 14.131,54.144 13.434,54.05 13.313,53.763 12.925,53.375
  region net NetB2_2: 49.6,54.5 49.1,54 49.034,53.783 48.975,53.599 48.1,52.724 48.1,52.7 48.075,52.7 47.55,53.225 47.675,53.35 47.6,53.8 47.675,54.2 48.55,55.075 48.725,55.075 49.038,55.037
  region net NetB2_2: 46.6,51.85 46.225,52.225 46.2,52.2 45.85,52.2 45.275,51.625 45.275,50.45 45.8,50.45 46.6,51.25
  region net 4V3: 50.4,52.113 49.7,51.938 47.7,50.512 47.35,50.512 46.975,51.05 47.35,51.338 49,52.713 49.695,52.857 50.325,53.363 50.45,53.413 50.575,53.317 50.75,53.112 51.05,52.637
  pour cut-out: 30.375,14.475 30.3,14.4 29.575,14.4 29.575,12.45 29.625,12.5 35.025,12.5 35.025,14.45 34.75,14.5 34.175,14.475
  pour cut-out: 12.449,5.354 9.274,9.478 8.799,10.117 9.024,10.293 10.574,11.638 14.026,7.212 14.399,6.878
  pour cut-out: 52.463,5.388 55.638,9.512 56.113,10.151 55.888,10.327 54.338,11.672 50.885,7.246 50.512,6.912
  pour cut-out: 52.687,59.762 55.862,55.638 56.337,54.999 56.112,54.823 54.562,53.478 51.11,57.904 50.737,58.238
  pour cut-out: 12.4,59.725 9.225,55.602 8.75,54.963 8.975,54.787 10.525,53.442 13.977,57.867 14.35,58.201
  pour cut-out: 18.404,19.725 18.557,19.725 18.988,19.293 19.547,19.293 19.928,18.912 20.03,18.607 20.081,18.328 20.055,18.049 20.004,17.998 20.004,17.795 18.912,16.702 18.76,16.499 17.718,15.255 17.414,14.594 17.007,14.188 16.753,14.112 16.423,14.086 16.22,14.112 16.093,14.188 15.255,14.874 15.255,15.305
  pour cut-out: 44.566,45.862 45.049,45.608 45.455,45.328 46.039,45.201 46.42,44.82 46.293,44.693 46.293,44.211 45.989,43.906 45.989,43.372 45.684,43.068 45.684,42.483 45.455,42.255 45.455,41.493 45.252,41.29 45.252,40.35 45.049,40.147 44.871,39.994 44.617,39.816 44.592,39.791 44.338,39.74 43.855,39.715 43.322,40.096 43.169,40.68 43.042,42.941 43.042,44.82 43.118,45.277 43.423,45.658 43.83,45.862 44.236,45.912
  pour cut-out: 30.456,48.775 34.925,48.775 34.925,44.225 30.375,44.225
  pour cut-out: 31.079,33.924 31.104,33.949 34.127,33.949 34.127,30.876 34.076,30.825 31.053,30.825
  pour cut-out: 24.932,52.567 26.25,51.125 26.425,50.95 26.608,50.678 29.479,50.5 32.603,50.5 35.956,50.475 37.505,50.526 38.575,51 38.738,51.163 40.401,53.329 38.738,56.162 37.4,57.5 28.125,57.5 27.025,56.4
  region net GND: 14.95,13.325 14.95,14.05 15.3,14.825 16.225,15.75 16.85,15.75 17.225,15.375 17.175,15.05 17.1,14.65 16.675,14.525 16.025,13.975 15.725,12.775 15.275,12.775 15.075,12.85
Bottom Layer:
  region net NetB3_2: 11.675,12.675 11.55,12.55 11.55,9.4 13.325,7.625 14.575,7.425 15.65,7.625 15.925,7.9 15.025,8.8 15.025,8.825 14.925,8.825 14.4,9.55 13.375,10.375 13.375,13.5
  region net 4V3: 16.7,13.825 16.15,13.575 15.025,13.225 14.322,12.522 14.322,10.253 15.025,9.55 15.125,9.65 15.55,9.65 15.85,11.075 16.4,12.275 16.4,12.425 17.05,13.075
  region net NetB3_2: 18.875,12.925 18.875,11.75 18.7,10.825 18.475,10.125 17.85,8.925 16.975,9.575 16.975,12.375 17.3,12.7
  region net 4V3: 16.7,13.825 17.475,14.6 18.125,14.975 18.879,15.447 18.951,15.375 19.65,15.375 19.65,14.35 19.825,14.175 19.375,13.725 18.6,13.725 18.2,13.825 18.1,13.85 17.837,13.866 17.05,13.075
  region net NetB1_1: 47.55,11.8 46.981,11.231 45.544,11.231 44.35,12.425 44.35,13.7 44.375,13.7 44.625,13.95 46.2,13.95 46.625,13.525
  region net 4V3: 48.213,13 49.122,12.359 50.15,12.275 50.65,12.775 50.025,13.4 49.775,13.7 49.35,14.35
  region net NetB4_1: 16.825,52.775 16.475,53.125 16.475,55.7 16.9,56.125 16.925,56.1 17.775,56.1 17.775,56.075 18.475,55.225 18.55,53.85 18.9,53.5 18.9,52.2 18.6,51.85 18.45,51.75 18.2,51.7
  region net NetB2_2: 48.1,52.7 48.25,52.8 48.768,53.392 49.3,54.175 49.4,54.625 49.3,54.95 49.125,54.95 48.95,55.125 48.9,55.075 48.55,55.075 47.55,54.075 47.55,53.225
  region net NetB2_2: 46.6,51.525 46.05,50.975 46.05,50.825 45.35,50.825 45.275,50.9 45.35,50.975 45.35,51.7 45.7,51.7 46.225,52.225
  pour cut-out: 30.375,14.475 30.3,14.4 29.575,14.4 29.575,12.45 29.625,12.5 35.025,12.5 35.025,14.45 34.75,14.5 34.175,14.475
  pour cut-out: 12.449,5.354 9.274,9.478 8.799,10.117 9.024,10.293 10.574,11.638 14.026,7.212 14.399,6.878
  pour cut-out: 52.463,5.388 55.638,9.512 56.113,10.151 55.888,10.327 54.338,11.672 50.885,7.246 50.512,6.912
  pour cut-out: 52.687,59.762 55.862,55.638 56.337,54.999 56.112,54.823 54.562,53.478 51.11,57.904 50.737,58.238
  pour cut-out: 12.4,59.725 9.225,55.602 8.75,54.963 8.975,54.787 10.525,53.442 13.977,57.867 14.35,58.201
  pour cut-out: 44.566,45.862 45.049,45.608 45.455,45.328 46.039,45.201 46.42,44.82 46.293,44.693 46.293,44.211 45.989,43.906 45.989,43.372 45.684,43.068 45.684,42.483 45.455,42.255 45.455,41.493 45.252,41.29 45.252,40.35 45.049,39.981 45.049,39.816 44.617,39.816 44.592,39.791 44.338,39.74 43.855,39.715 43.322,40.096 43.169,40.68 43.042,42.941 43.042,44.82 43.118,45.277 43.423,45.658 43.83,45.862 44.236,45.912
  region net 4V3: 20.258,46.522 20.233,46.573 20.284,46.751 20.36,46.954 20.502,48.669 22.175,48.669 22.341,48.503 22.087,47.411 21.782,46.649 21.706,46.243 21.655,46.116 21.503,45.938 21.3,45.811 21.02,45.735 20.716,45.785 20.69,45.811 20.487,45.938 20.309,46.166 20.258,46.37
  pour cut-out: 26.225,51 24.983,52.516 27.025,56.4 28.125,57.5 37.4,57.5 38.738,56.162 38.656,56.081 40.401,53.304 38.75,50.9 37.911,50.551 35.956,50.475 32.984,50.475 30.926,50.5 29.072,50.526 27.396,50.602 26.659,50.704

## Silkscreen, mask and mechanical layers (free items; w line width, h text height)
Top Overlay:
  lines w0.254: 7.571,59.921 8.381,59.921 ; 8.381,59.308 8.381,59.921 ; 9.557,59.871 cw(c8.91,58.504) 8.381,59.921 ; 9.769,6.402 10.141,6.78 10.151,6.78 10.153,6.78 10.531,6.408 ; 9.913,7.327 ccw(c8.738,6.375) 10.215,6.699 ; 53.729,6.73 54.223,7.224 54.269,7.224 ; 54.463,7.674 cw(c55.736,6.857) 54.269,7.224 ; 54.694,6.781 54.269,7.207 54.269,7.224 ; 58.082,59.604 58.457,59.979 58.467,59.979 ; 58.165,60.607 ccw(c56.99,59.654) 58.467,59.979 ; 58.844,59.604 58.469,59.979 58.467,59.979
  lines w0.5: 30.314,16.829 31.714,16.829 ; 33.148,16.817 34.698,16.817 ; 33.898,16.042 33.898,17.642
  text "2" at 56.482,58.918 h1.52
  text "4" at 8.427,57.691 h1.52
  text "1" at 55.482,6.12 h1.52
  text "3" at 8.23,5.689 h1.52
Bottom Overlay:
  text "GND" at 42.661,44.566 h0.76
  text "JTCK" at 43.025,42.6 h0.76
  text "JMS" at 42.725,40.525 h0.76
  text "RX" at 23.975,34.225 h0.76
  text "TX" at 24.075,31.15 h0.76
  text "JMS" at 22.175,16.65 h0.76
  text "JTCK" at 21.85,15.625 h0.76
  text "GND" at 19.875,14.625 h0.76
Top Solder:
  region: 26.25,52.525 27.04,52.669 27.65,53.024 28.107,53.659 28.25,54.5 28.25,56.377 28.285,57.165 28.386,57.292 28.513,57.419 28.85,57.5 29.631,57.52 30.799,57.546 33.009,57.5 36.337,57.495 36.768,57.139 36.75,56.606 36.75,55.971 36.743,55.006 36.75,54.475 36.921,53.71 37.2,53.278 37.556,52.923 38.738,52.526 38.216,52.059 37.937,51.754 37.607,51.602 36.921,51.221 36.438,50.738 30.774,50.738 29.91,51.475 27.726,52.059 27.243,52.212 26.659,52.339
Bottom Solder:
  region: 26.25,52.525 27.04,52.669 27.65,53.024 28.107,53.659 28.25,54.5 28.25,56.377 28.285,57.165 28.386,57.292 28.513,57.419 28.85,57.5 29.631,57.52 30.799,57.546 33.009,57.5 36.337,57.495 36.768,57.139 36.75,56.606 36.75,55.971 36.743,55.006 36.75,54.475 36.921,53.71 37.2,53.278 37.556,52.923 38.738,52.526 38.216,52.059 37.937,51.754 37.607,51.602 36.921,51.221 36.438,50.738 30.291,50.738 28.259,51.348 27.269,51.907 26.951,52.275 26.659,52.339

## Text inside footprints (layer, text, board x,y; h text height)
U1: Top Overlay "STM32" at 30.675,22.6 h0.76